# Altium PCB PCB1.PcbDoc (part 1 of 2)
Units mm, origin at the board's own origin, x right, y up, seen from the top; angles counter-clockwise.
Board outline 62 x 97.84 mm, 6 copper layers (Top Layer, +5V, Signal Layer 1, Signal Layer 2, +3.3V, Bottom Layer), stack 1.231 mm thick; 82 components, 61 nets, 315 pads, 76 vias.
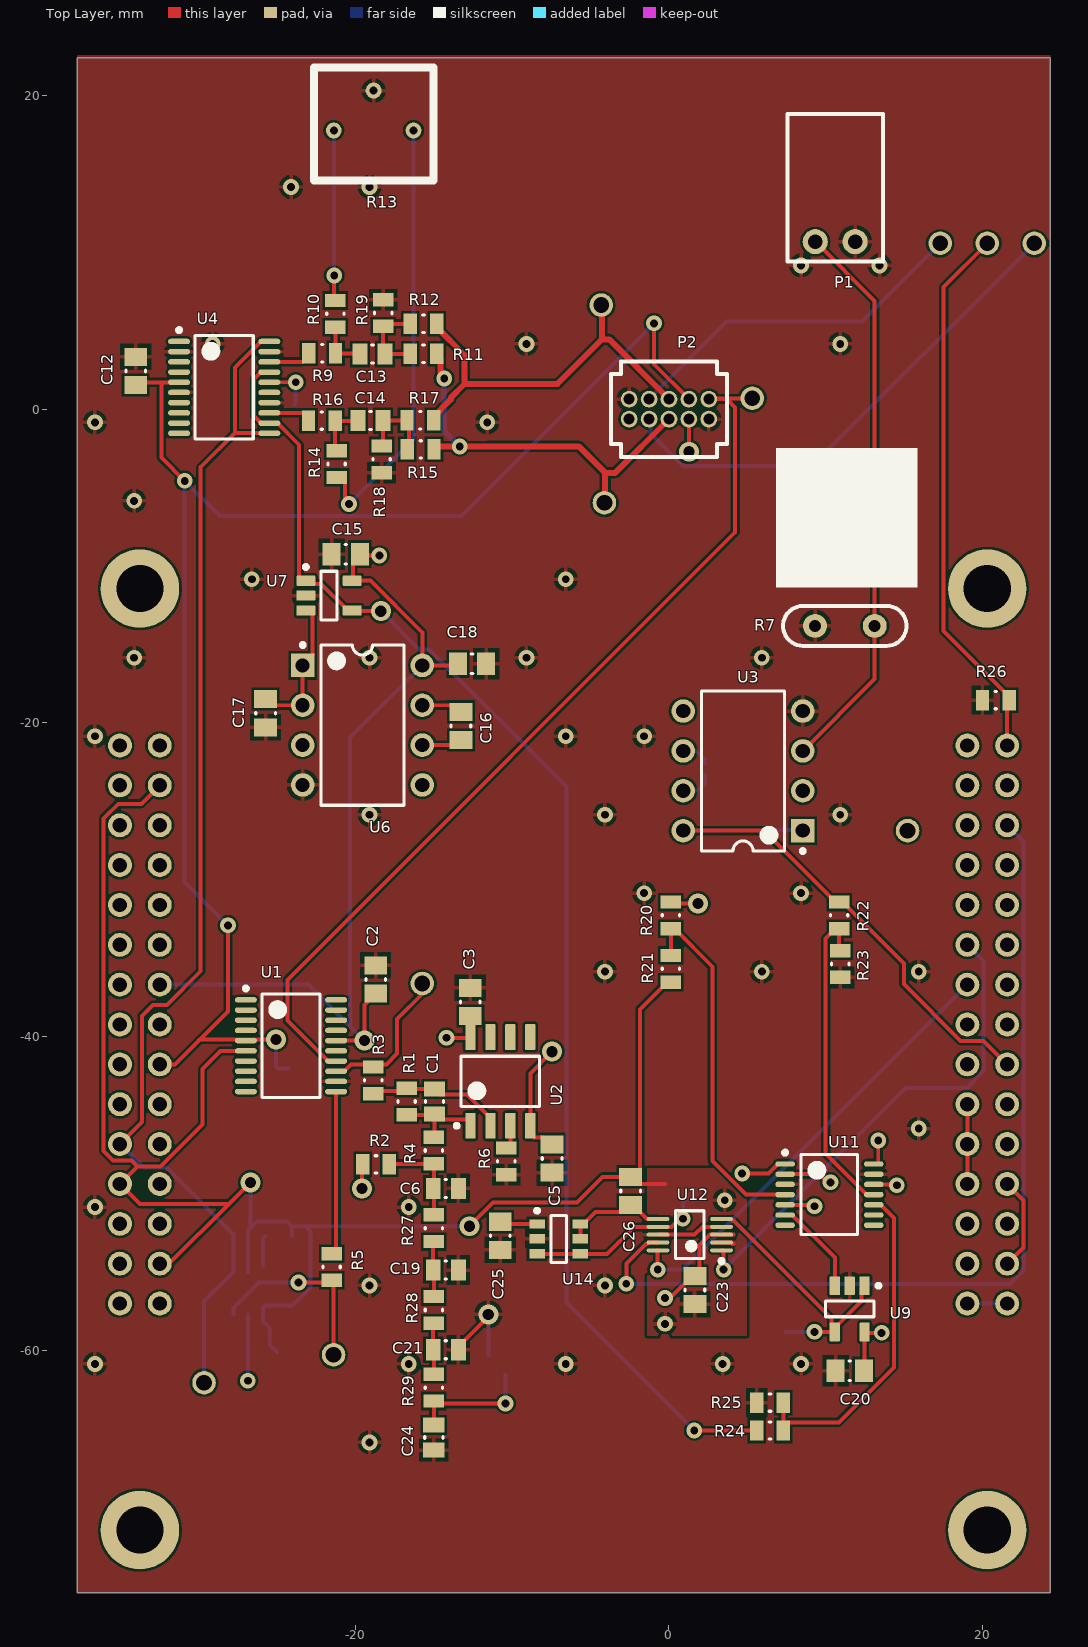
[diagram p0: Top Layer view]
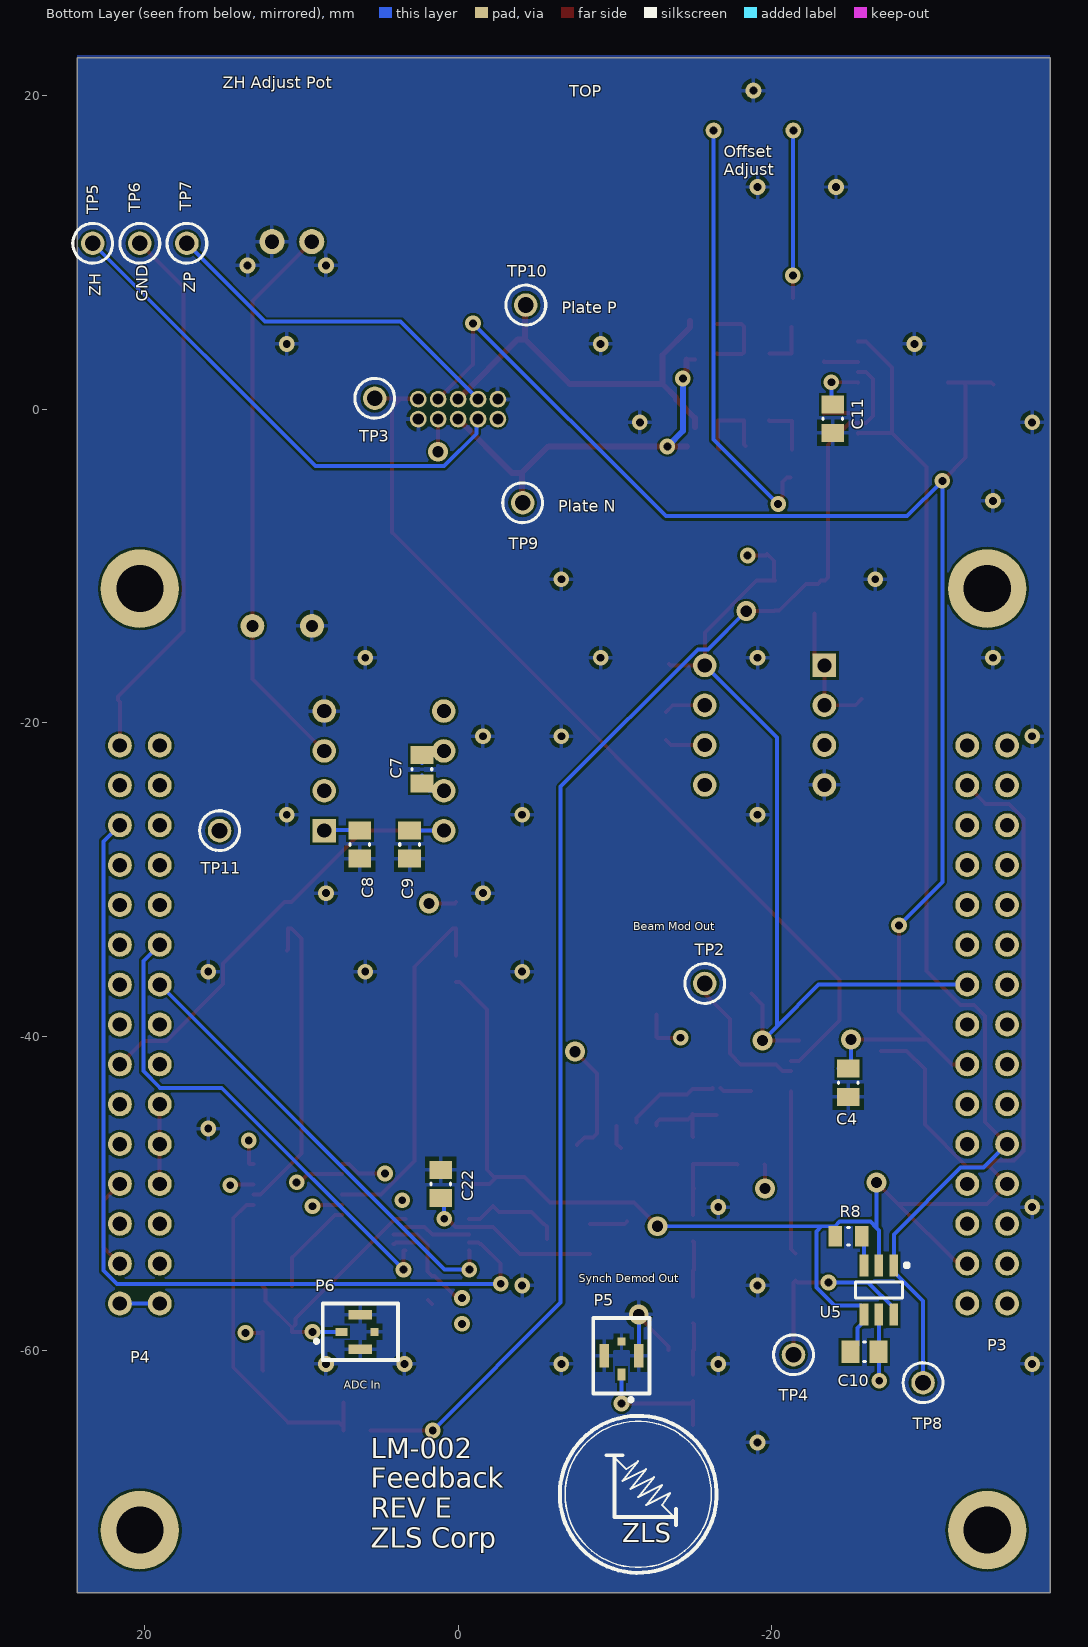
[diagram p1: Bottom Layer view, seen from below]
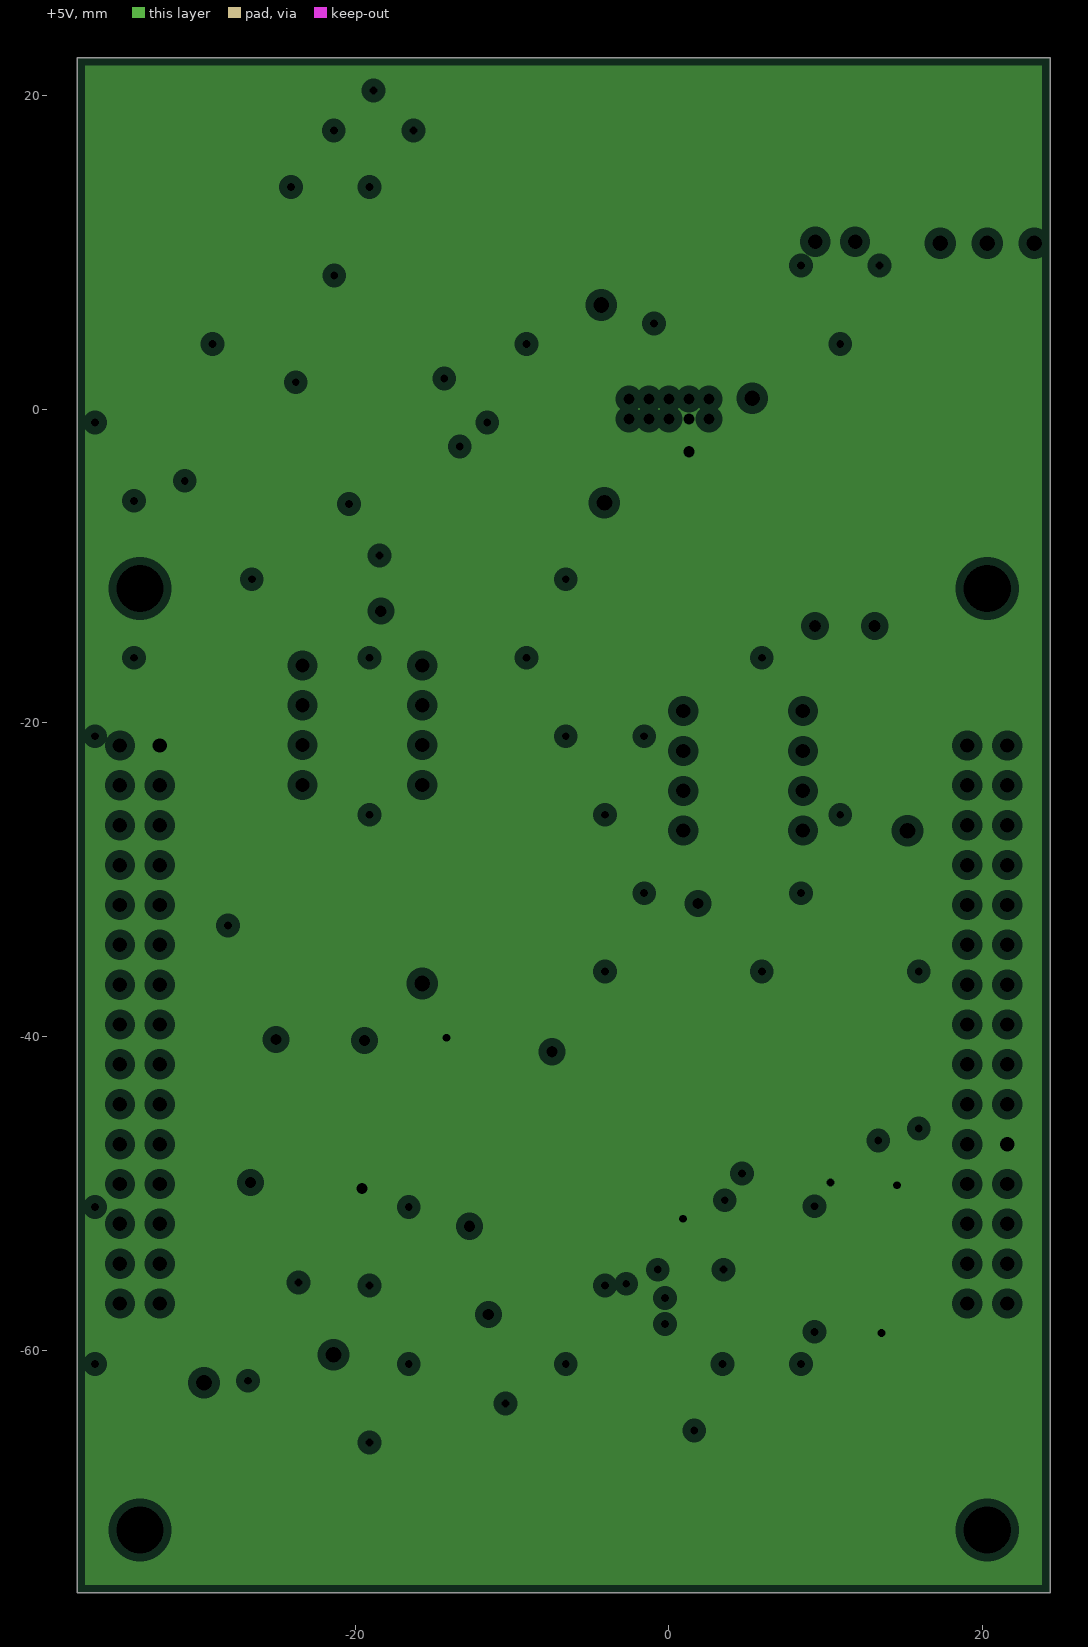
[diagram p2: +5V, clearances drawn from the general rule]
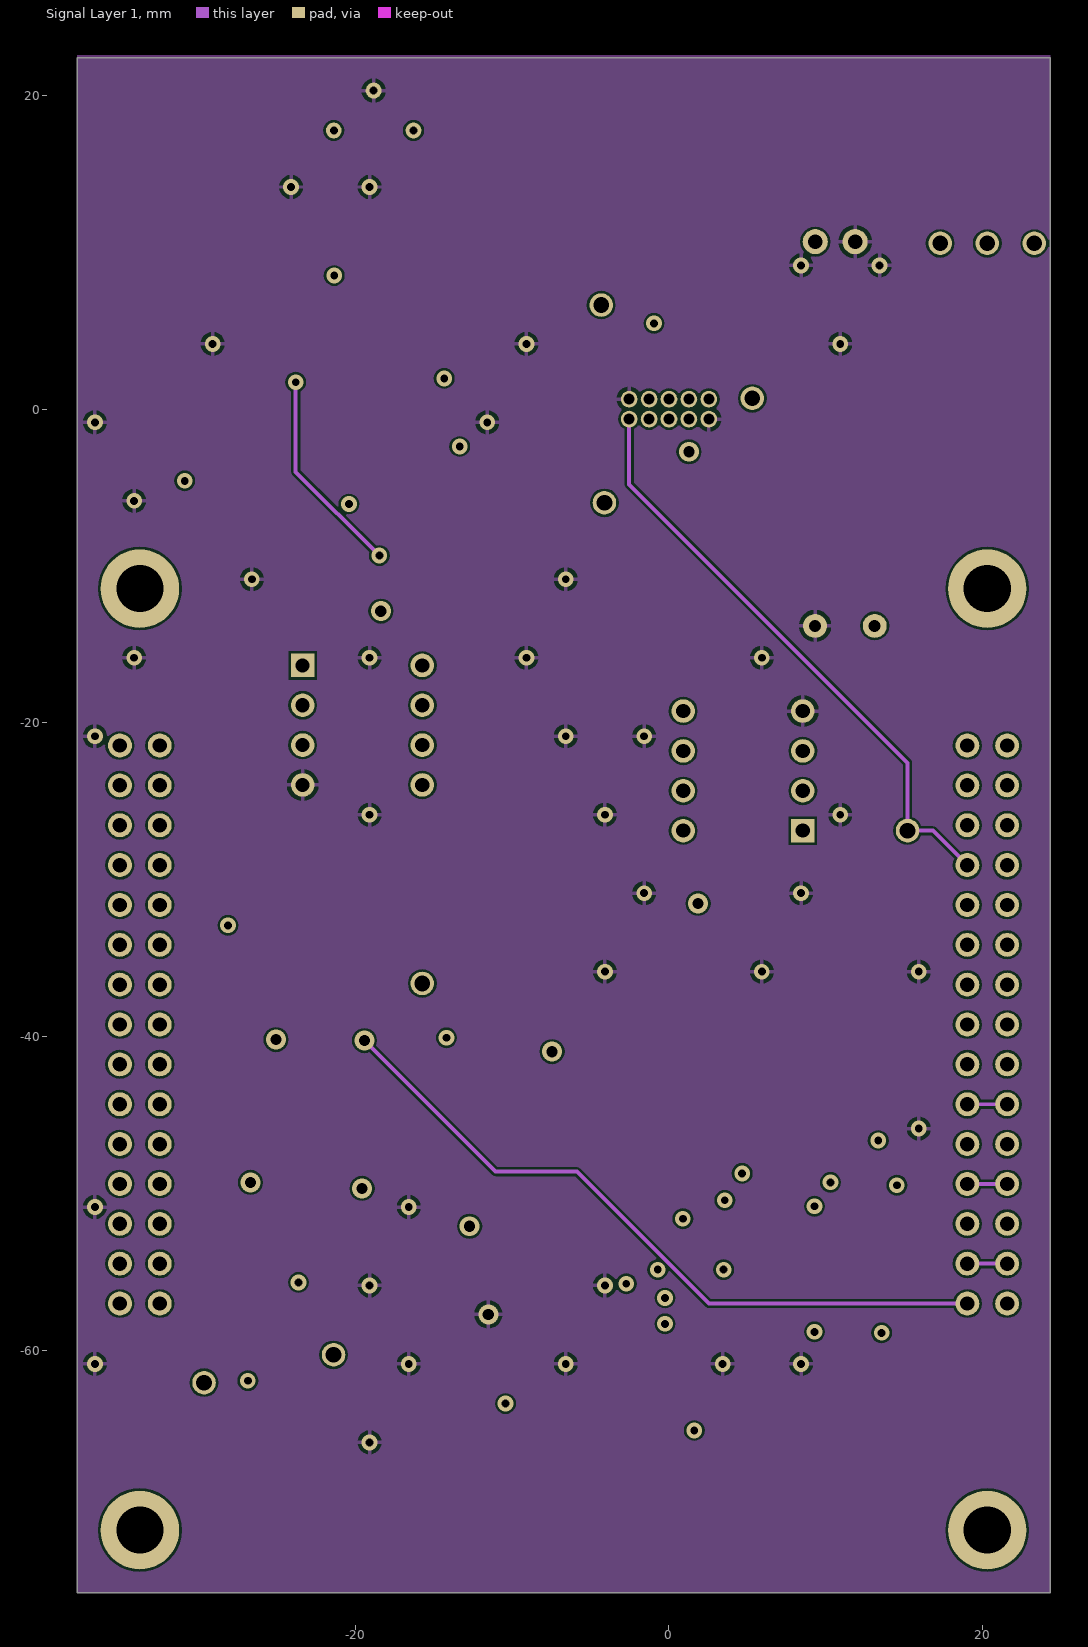
[diagram p3: Signal Layer 1]
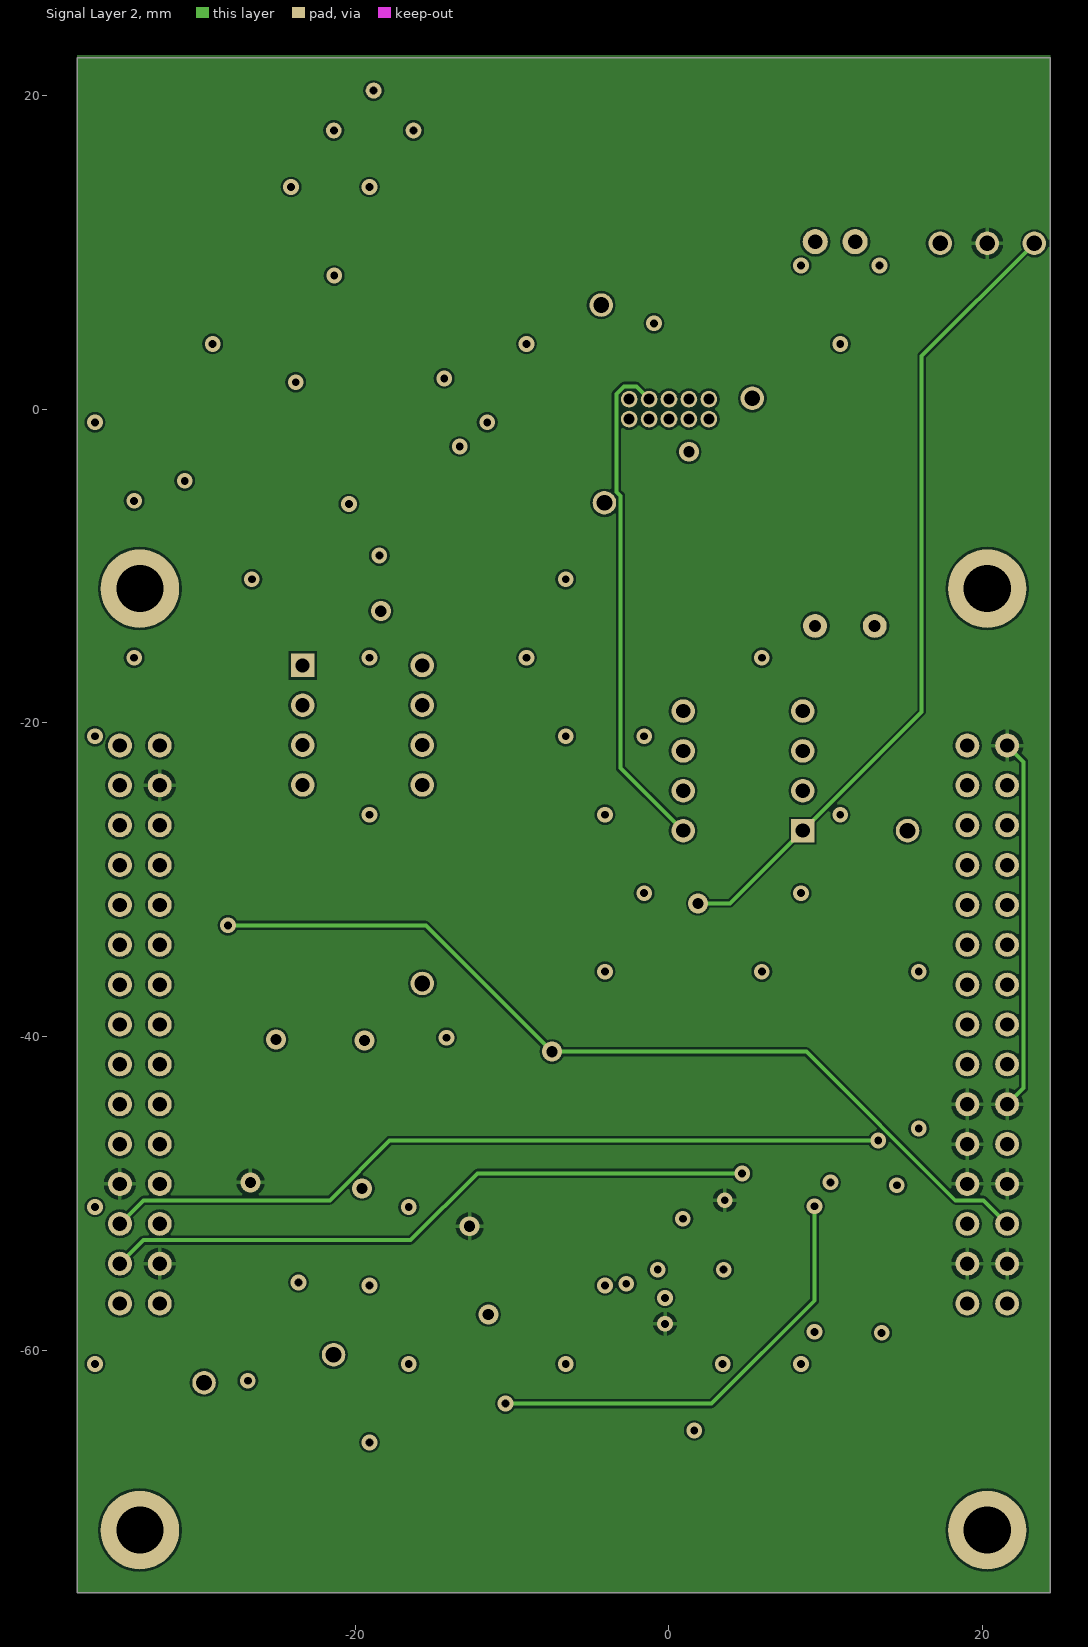
[diagram p4: Signal Layer 2]
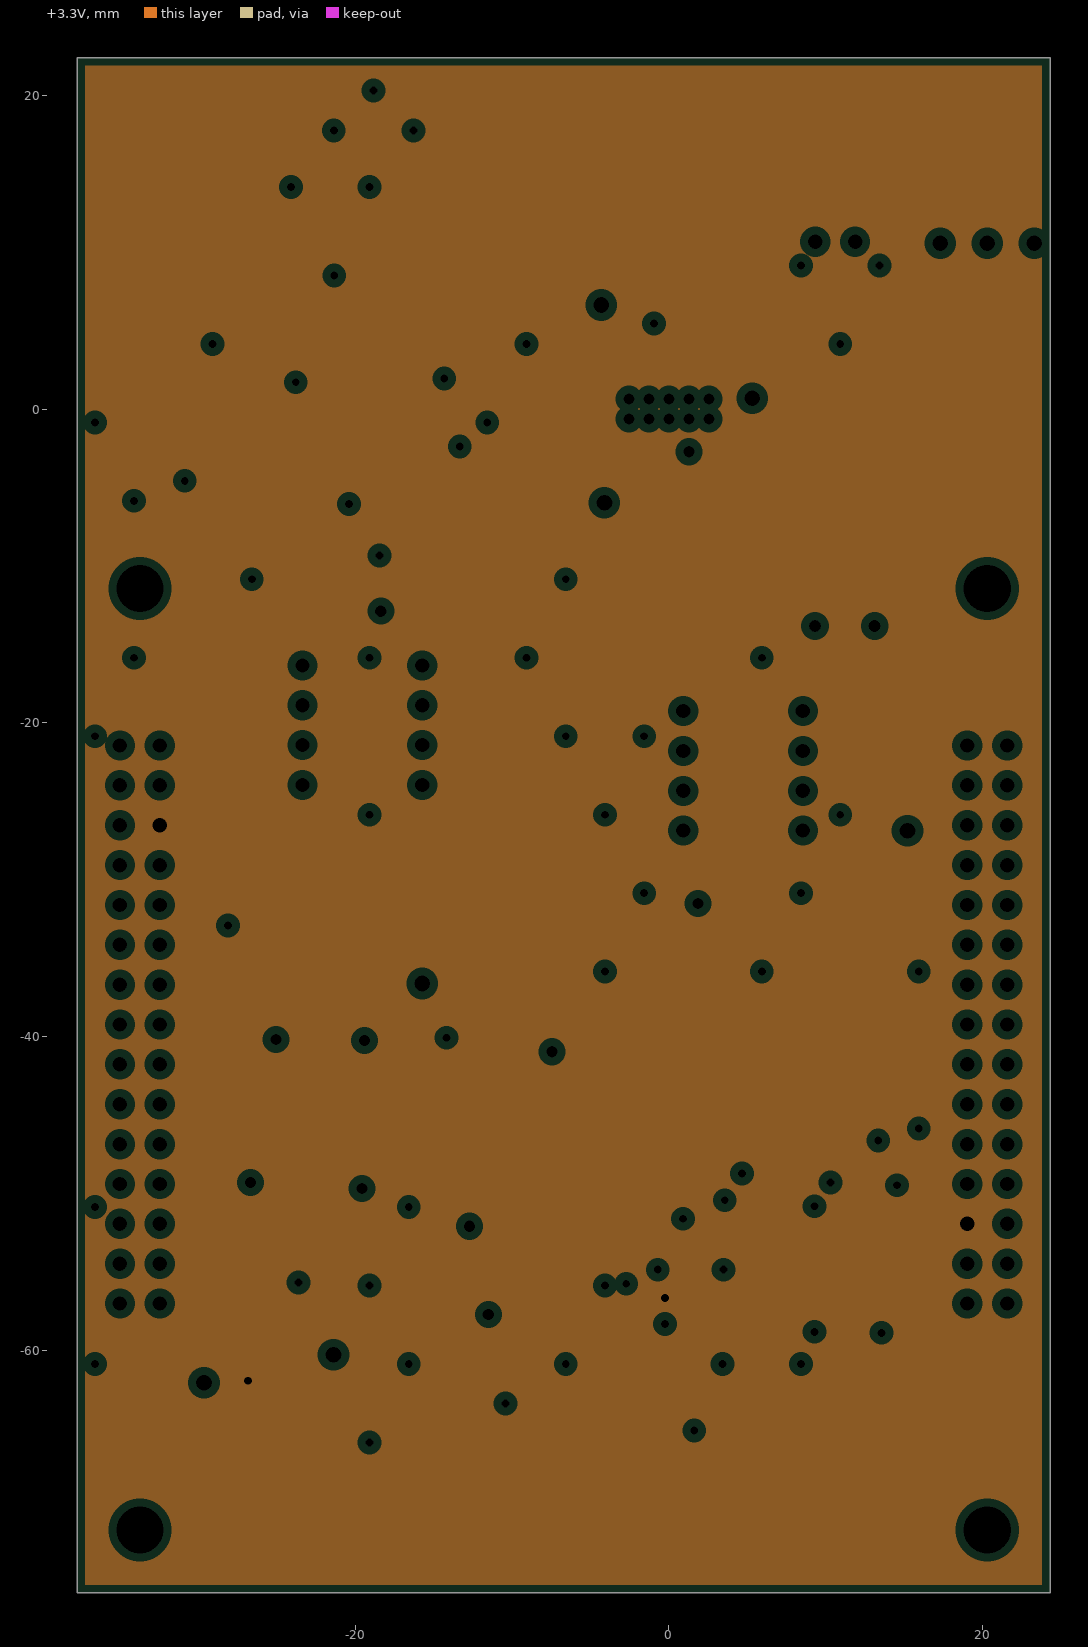
[diagram p5: +3.3V, clearances drawn from the general rule]

## Layer stack, top to bottom
Top Solder: solder mask 0.0102, Solder Resist, Dk 3.5
Top Layer: signal copper 0.0356
Dielectric 1: core 0.254, FR-4, Dk 4.2
+5V: plane copper 0.036, net +5
Dielectric 4: prepreg 0.127, Dk 4.2
Signal Layer 1: signal copper 0.036
Dielectric 5: core 0.254, Dk 4.2
Signal Layer 2: signal copper 0.036
Dielectric 6: prepreg 0.127, Dk 4.2
+3.3V: plane copper 0.036, net +3.3
Dielectric 3: core 0.254, Dk 4.2
Bottom Layer: signal copper 0.0356
Bottom Solder: solder mask 0.0102, Solder Resist, Dk 3.5

## Board outline
-37.722,-75.441 24.281,-75.441 24.281,22.403 -37.722,22.403

## Design rules (kind name [scope] priority, off if disabled: settings)
Clearance [All] p1: gap=0.15 ignorepadtopadclearanceinfootprint=TRUE except(0.04: SMDPad-SMDPad; 0.1: SMDPad-THPad)
DiffPairsRouting DiffPair_DiffPairsRouting [InDifferentialPair ('PLATE')] p1: maxlimit=0.254 minlimit=0.254 mostfreqgap=0.254 toplayer_minwidth=0.381 toplayer_maxwidth=0.381 toplayer_prefwidth=0.381 midlayer1_minwidth=0.381 midlayer1_maxwidth=0.381 midlayer1_prefwidth=0.381 midlayer2_minwidth=0.381 midlayer2_maxwidth=0.381 midlayer2_prefwidth=0.381 bottomlayer_minwidth=0.381 bottomlayer_maxwidth=0.381 bottomlayer_prefwidth=0.381 maxuncoupledlength=12.7
DiffPairsRouting [All] p2: maxlimit=0.254 minlimit=0.254 mostfreqgap=0.254 toplayer_minwidth=0.381 toplayer_maxwidth=0.381 toplayer_prefwidth=0.381 midlayer1_minwidth=0.381 midlayer1_maxwidth=0.381 midlayer1_prefwidth=0.381 midlayer2_minwidth=0.381 midlayer2_maxwidth=0.381 midlayer2_prefwidth=0.381 bottomlayer_minwidth=0.381 bottomlayer_maxwidth=0.381 bottomlayer_prefwidth=0.381 maxuncoupledlength=12.7
HoleSize [All] p1: absolutevalues=TRUE maxlimit=10 minlimit=0.076 maxpercent=80.000 minpercent=20.000
HoleToHoleClearance [All] p1: gap=0.12 allowstackedmicrovias=TRUE
MatchedLengths DiffPair_MatchedLengths [InDifferentialPair ('PLATE')] p1: tolerance=2.54 checknetsindiffpair=FALSE checkdiffpairvsdiffpair=TRUE checkxsignals=TRUE checkothers=TRUE
MinimumSolderMaskSliver [All] p1: minsoldermaskwidth=0.025
PlaneClearance [All] p1: clearance=0.508
PlaneConnect [All] p1: planeconnectstyle=Relief reliefexpansion=0.508 reliefentries=4 reliefconductorwidth=0.254 reliefairgap=0.254
PolygonConnect [All] p1: connectstyle=Relief reliefconductorwidth=0.254 reliefentries=4 polygonreliefangle="90 Angle" airgapwidth=0.254
RoutingVias [All] p1: holewidth=0.711 width=1.27 viastyle="Through Hole" minholewidth=0.127 minwidth=0.9 maxholewidth=1.4 maxwidth=2.54
SilkToSilkClearance [All] p1: silktosilkclearance=0.12
SilkToSolderMaskClearance [IsPad] p1: minsilkscreentomaskgap=0.12 clearancetoexposedcopper=TRUE
SolderMaskExpansion [All] p1: expansion=0.102
Width [All] p1: maxlimit=0.254 minlimit=0.1 preferedwidth=0.254
22 further rules are at their usual default settings.

## Classes and differential pairs
component class Sheet2: C20 C22 C23 C25 C26 P6 R20 R21 R22 R23 R24 R25 U9 U11 U12 U14
component class Sheet1: 19.685mil C1 C2 C3 C4 C5 C6 C7 C8 C9 C10 C11 C12 C13 C14 C15 C16 C17 C18 C19 C21 C24 P1 P2 P3 P4 P5 R1 R2 R3 R4 R5 R6 R7 R8 R9 R10 R11 R12 R13 R14 R15 R16 R17 R18 R19 R26 R27 R28 R29 TP2 TP3 TP4 TP5 TP6 TP7 TP8 TP9 TP10 TP11 U1 U2 U3 U4 U5 U6 U7
differential pair PLATE: +PLATE_P -PLATE_N

## Components (designator, comment, footprint, x,y, rotation, side; value= is the part's Value field where it differs from the comment)
C1 "470nF" CAPC0805(2012)75_L -14.946,-44.128 r270 top
C2 "CAP CER 0.1UF 25V X7R 0805" CAPC0805(2012)145_N -18.694,-36.347 r90 top
C3 "CAP CER 0.1UF 25V X7R 0805" CAPC0805(2012)145_N -12.66,-37.778 r90 top
C4 "CAP CER 0.1UF 25V X7R 0805" CAPC0805(2012)145_N -24.867,-42.926 r270 bottom
C5 "CAP CER 0.1UF 25V X7R 0805" CAPC0805(2012)145_N -7.453,-47.755 r270 top
C6 ".1u" CAPC0805(2012)75_L -14.224,-49.657 r180 top
C7 "CAP CER 0.1UF 25V X7R 0805" CAPC0805(2012)145_N 2.304,-22.951 r90 bottom
C8 "CAP CER 0.1UF 25V X7R 0805" CAPC0805(2012)145_N 6.263,-27.741 r270 bottom
C9 "Multilayer Ceramic Capacitors MLCC - SMD/SMT 0.01uF 50volts 10% X7R" CAPC0805(2012)145_N 3.088,-27.741 r270 bottom
C10 "CAP CER 0.1UF 25V X7R 0805" CAPC0805(2012)145_N -25.894,-60.075 r0 bottom
C11 "CAP CER 0.1UF 25V X7R 0805" CAPC0805(2012)145_N -23.876,-0.61 r270 bottom
C12 "CAP CER 0.1UF 25V X7R 0805" CAPC0805(2012)145_N -33.985,2.433 r90 top
C13 "CAP CER 1UF 25V X7R 0805" CAPC0805(2012)155_L -18.898,3.505 r180 top
C14 "CAP CER 1UF 25V X7R 0805" CAPC0805(2012)155_L -19.025,-0.737 r180 top
C15 "CAP CER 0.1UF 25V X7R 0805" CAPC0805(2012)145_N -20.599,-9.246 r0 top
C16 "CAP CER 0.1UF 25V X7R 0805" CAPC0805(2012)145_N -13.259,-20.193 r270 top
C17 "CAP CER 0.1UF 25V X7R 0805" CAPC0805(2012)145_N -25.705,-19.38 r270 top
C18 "Multilayer Ceramic Capacitors MLCC - SMD/SMT 0.01uF 50volts 10% X7R" CAPC0805(2012)145_N -12.548,-16.231 r0 top
C19 "1u" CAPC0805(2012)75_L -14.224,-54.864 r180 top
C20 "CAP CER 0.1UF 25V X7R 0805" CAPC0805(2012)145_N 11.518,-61.278 r0 top
C21 "1u" CAPC0805(2012)75_L -14.224,-59.944 r180 top
C22 "CAP CER 0.1UF 25V X7R 0805" CAPC0805(2012)145_N 1.11,-49.383 r90 bottom
C23 "CAP CER 0.1UF 25V X7R 0805" CAPC0805(2012)145_N 1.651,-56.134 r270 top
C24 "1u" CAPC0805(2012)75_L -14.986,-65.532 r90 top
C25 "CAP CER 0.1UF 25V X7R 0805" CAPC0805(2012)145_N -10.752,-52.685 r90 top
C26 "CAP CER 0.1UF 25V X7R 0805" CAPC0805(2012)145_N -2.446,-49.82 r90 top
P1 "SSW-102-02-G-S-RA" SSW-102-02-G-S-RA 11.862,10.668 r180 top
P2 "FTSH-105-01-L-D-K" FTSH-105-01-XXX-D-K 0,0 r180 top
P3 "TSW-115-14-G-D" TSW-115-14-G-D -32.449,-56.998 r270 bottom locked
P4 "TSW-115-14-G-D" TSW-115-14-G-D 21.551,-56.998 r270 bottom locked
P5 "SMB" RSP-122811-02 -10.414,-60.325 r180 bottom
P6 "SMB" RSP-122811-02 6.223,-58.801 r270 bottom
R1 "300k" RESC0805(2012)_L -16.724,-44.128 r90 top
R2 "100k" RESC0805(2012)_L -18.669,-48.133 r180 top
R3 "18.2k" RESC0805(2012)_L -18.847,-42.774 r90 top
R4 "511k" RESC0805(2012)_L -14.986,-47.244 r90 top
R5 "0" RESC0805(2012)_L -21.502,-54.674 r90 top
R6 "33k" RESC0805(2012)_L -10.374,-47.938 r90 top
R7 "TBD" VH102K 13.11,-13.815 r180 top
R8 "43.2K" RESC0805(2012)_L -24.878,-52.709 r0 bottom
R9 "4.02K" RESC0805(2012)_L -22.098,3.556 r180 top
R10 "7.5k" RESC0805(2012)_L -21.26,6.071 r270 top
R11 "0" RESC0805(2012)_L -15.646,3.531 r180 top
R12 "DNP" RESC0805(2012)_L -15.646,5.436 r180 top
R13 "TRIMMER 5K OHM 0.25W PC PIN" "TRIMMER 2.54" -21.361,17.755 r0 top
R14 "7.5k" RESC0805(2012)_L -21.184,-3.505 r270 top
R15 "DNP" RESC0805(2012)_L -15.824,-2.565 r180 top
R16 "4.02K" RESC0805(2012)_L -22.123,-0.737 r0 top
R17 "0" RESC0805(2012)_L -15.85,-0.711 r180 top
R18 "1M" RESC0805(2012)_L -18.313,-3.2 r90 top
R19 "1M" RESC0805(2012)_L -18.212,6.121 r270 top
R20 "100k" RESC0805(2012)_L 0.119,-32.263 r90 top
R21 "10k" RESC0805(2012)_L 0.119,-35.667 r90 top
R22 "100k" RESC0805(2012)_L 10.838,-32.263 r90 top
R23 "10k" RESC0805(2012)_L 10.914,-35.362 r90 top
R24 "10K" RESC0805(2012)_L 6.438,-65.088 r180 top
R25 "10K" RESC0805(2012)_L 6.438,-63.31 r0 top
R26 "0" RESC0805(2012)_L 20.828,-18.542 r180 top
R27 "20k" RESC0805(2012)_L -14.986,-52.197 r90 top
R28 "20k" RESC0805(2012)_L -14.986,-57.404 r90 top
R29 "20k" RESC0805(2012)_L -14.986,-62.357 r90 top
TP2 "5003" KSTN-5003 -15.723,-36.601 r90 bottom
TP3 "5003" KSTN-5003 5.309,0.686 r90 bottom
TP4 "5003" KSTN-5003 -21.375,-60.262 r270 bottom
TP5 "5003" KSTN-5003 23.281,10.562 r90 bottom
TP6 "5003" KSTN-5003 20.281,10.562 r90 bottom
TP7 "5003" KSTN-5003 17.281,10.562 r90 bottom
TP8 "5003" KSTN-5003 -29.63,-62.04 r270 bottom
TP9 "5003" KSTN-5003 -4.115,-5.969 r270 bottom
TP10 "5003" KSTN-5003 -4.318,6.629 r90 bottom
TP11 "5003" KSTN-5003 15.201,-26.861 r90 bottom
U1 "MAX333AEUP+" TSOP65P640X90-20N -24.087,-40.569 r0 top
U2 "LPC662AIM" D0008A_M -10.745,-42.843 r90 top
U3 "AD584KNZ" ADI-N-8 4.717,-23.053 r180 top
U4 "MAX333AEUP+" TSOP65P640X90-20N -28.346,1.383 r0 top
U5 "LTC6994MPS6-2#TRMPBF" LTC6994MPS6-2#TRMPBF -26.816,-56.135 r270 bottom
U6 "AD584KNZ" ADI-N-8 -19.533,-20.142 r0 top
U7 "OPA188AIDBVR" DBV0005A_M -21.666,-11.887 r0 top
U9 "OPA188AIDBVR" DBV0005A_M 11.518,-57.341 r270 top
U11 "ADG1204YRUZ-REEL7" ADI-RU-14_L 10.222,-50.056 r0 top
U12 "MAX11100EUB+T" U10+2_L 1.325,-52.608 r180 top
U14 "MAX6070AAUT41+T" SOT95P280X445-6N -7.028,-52.881 r0 top

## Footprints (in the part's own frame and the unit in brackets; to place one, negate y for a bottom-side part, rotate by r counter-clockwise, add the part's x,y. Pads: shape width x height; smd on the part's side, far side on the other; paste and mask are expansions set on the pad)
ADI-N-8 [mm] "DIP, 8-Leads, Body 9.59x6.6mm, Pitch 2.54mm"
  rect 1.5x1.5 hole 0.9: 1(-3.81,3.81)
  round 1.5 hole 0.9: 2(-3.81,1.27) 3(-3.81,-1.27) 4(-3.81,-3.81) 5(3.81,-3.81) 6(3.81,-1.27) 7(3.81,1.27) 8(3.81,3.81)
  silkscreen extent -3.94,-5.1 2.65,5.23, body extent -3.95,-5.07 3.95,5.07, height 5.33
ADI-RU-14_L [mm] "SOP, 14-Leads, Body 5x4.4mm, Pitch 0.65mm, IPC High Density"
  oval 1.25x0.35 smd: 1(-2.825,1.95) 2(-2.825,1.3) 3(-2.825,0.65) 4(-2.825,0) 5(-2.825,-0.65) 6(-2.825,-1.3) 7(-2.825,-1.95) 8(2.825,-1.95) 9(2.825,-1.3) 10(2.825,-0.65) 11(2.825,0) 12(2.825,0.65) 13(2.825,1.3) 14(2.825,1.95)
  silkscreen extent -2.95,-2.55 1.8,2.8, body extent -2.25,-2.55 2.25,2.55, height 1.2
CAPC0805(2012)75_L [mm] "Chip Capacitor, Body 2.0x1.2mm, Height 0.75mm, IPC High Density"
  rect 0.95x1.35 smd: 1(-0.8,0) 2(0.8,0)
  silkscreen extent -0.05,-0.57 0.05,0.58, body extent -1.1,-0.72 1.1,0.72, height 0.75
CAPC0805(2012)145_N [mm] "Chip Capacitor, Body 2.0x1.2mm, Height 1.45mm, IPC Medium Density"
  rect 1.15x1.45 smd: 1(-0.9,0) 2(0.9,0)
  silkscreen extent -0.05,-0.62 0.05,0.63, body extent -1.1,-0.72 1.1,0.73, height 1.45
CAPC0805(2012)155_L [mm] "Chip Capacitor, Body 2.0x1.2mm, Height 1.55mm, IPC High Density"
  rect 0.95x1.35 smd: 1(-0.8,0) 2(0.8,0)
  silkscreen extent -0.05,-0.58 0.05,0.57, body extent -1.1,-0.72 1.1,0.72, height 1.55
D0008A_M [mm] "SOIC, 8-Leads, Body 5x4mm, Pitch 1.27mm, IPC Low Density"
  rrect15% 1.65x0.65 smd: 1(-2.825,1.905) 2(-2.825,0.635) 3(-2.825,-0.635) 4(-2.825,-1.905) 5(2.825,-1.905) 6(2.825,-0.635) 7(2.825,0.635) 8(2.825,1.905)
  silkscreen extent -2.95,-2.5 1.6,2.9, body extent -3,-2.45 3,2.45, height 1.63
DBV0005A_M [mm] "SOT23, 5-Leads, Body 3.05x1.75mm, Pitch 0.95mm, IPC Low Density"
  rrect15% 1.2x0.65 smd: 1(-1.475,0.95) 2(-1.475,0) 3(-1.475,-0.95) 4(1.475,-0.95) 5(1.475,0.95)
  silkscreen extent -1.6,-1.55 0.5,1.95, body extent -1.42,-1.46 1.42,1.46, height 1.08
FTSH-105-01-XXX-D-K [mil]
  round 42 hole 28 mask+3: 1(-100,-25) 2(-100,25) 3(-50,-25) 4(-50,25) 5(0,-25) 6(0,25) 7(50,-25) 8(50,25) 9(100,-25) 10(100,25)
  silkscreen extent -145,-120 145,120
KSTN-5003 [mm] "Test Point, Through Hole, Dia 2.54mm"
  round 1.5 hole 1: 1(0,0)
  silkscreen extent -1.27,-1.27 1.27,1.27, body extent -1.27,-1.27 1.27,1.27, height 4.57
LTC6994MPS6-2#TRMPBF [mm] "SOT23, 6-Leads, Body 2.90x3.23mm, Pitch 0.95mm, IPC Medium Density"
  rect 1.4x0.55 smd: 1(-1.575,0.95) 2(-1.575,0) 3(-1.575,-0.95) 4(1.575,-0.95) 5(1.575,0) 6(1.575,0.95)
  silkscreen extent -1.7,-1.5 0.5,1.9, body extent -1.92,-1.5 1.92,1.5, height 1
RESC0805(2012)_L [mm] "Chip Resistor, Body 2.0x1.3mm, IPC High Density"
  rect 0.85x1.3 smd: 1(-0.85,0) 2(0.85,0)
  silkscreen extent -0.05,-0.55 0.05,0.55, body extent -1.1,-0.67 1.1,0.68, height 0.7
RSP-122811-02 [mm]
  rect 0.5x0.75 smd: 1(0,-1.2)
  rect 0.6x1.5 smd: 2(-1.1,0) 2(1.1,0)
  rect 0.5x0.5 smd: 2(0,0.9)
  silkscreen extent -1.8,-2.9 1.8,2.4
SOT95P280X445-6N [mm] "SOT23, 6-Leads, Body 2.90x2.80mm, Pitch 0.95mm, IPC Medium Density"
  rect 1x0.6 smd: 1(-1.375,0.95) 2(-1.375,0) 3(-1.375,-0.95) 4(1.375,-0.95) 5(1.375,0) 6(1.375,0.95)
  silkscreen extent -1.5,-1.5 0.5,1.92, body extent -2.11,-1.78 2.11,1.73, height 1.08
SSW-102-02-G-S-RA [mm]
  round 1.6 hole 0.91: 1(0,0) 2(2.54,0)
  silkscreen extent -1.78,-8.13 4.32,1.27, body extent -1.52,-8.06 4.06,0.44, height 3.21
"TRIMMER 2.54" [mil]
  round 40 hole 20: 1(0,0) 2(100,100) 3(200,0)
  silkscreen extent -50,-125 250,158, body extent -60,-126 260,200, height 175
TSOP65P640X90-20N [mm] "TSOP, 20-Leads, Body 6.50x4.40mm, Pitch 0.65mm, IPC Medium Density"
  oval 1.4x0.35 smd: 1(-2.875,2.925) 2(-2.875,2.275) 3(-2.875,1.625) 4(-2.875,0.975) 5(-2.875,0.325) 6(-2.875,-0.325) 7(-2.875,-0.975) 8(-2.875,-1.625) 9(-2.875,-2.275) 10(-2.875,-2.925) 11(2.875,-2.925) 12(2.875,-2.275) 13(2.875,-1.625) 14(2.875,-0.975) 15(2.875,-0.325) 16(2.875,0.325) 17(2.875,0.975) 18(2.875,1.625) 19(2.875,2.275) 20(2.875,2.925)
  silkscreen extent -3,-3.3 1.85,3.77, body extent -2.25,-3.3 2.25,3.3, height 0.9
TSW-115-14-G-D [mil]
  round 60 hole 36.02: 1(-1400,100) 2(-1400,0) 3(-1300,100) 4(-1300,0) 5(-1200,100) 6(-1200,0) 7(-1100,100) 8(-1100,0) 9(-1000,100) 10(-1000,0) 11(-900,100) 12(-900,0) 13(-800,100) 14(-800,0) 15(-700,100) 16(-700,0) 17(-600,100) 18(-600,0) 19(-500,100) 20(-500,0) 21(-400,100) 22(-400,0) 23(-300,100) 24(-300,0) 25(-200,100) 26(-200,0) 27(-100,100) 28(-100,0) 29(0,100) 30(0,0)
  body extent -1450,-50 50,150, height 118
U10+2_L [mm] "TSSOP, 10-Leads, Body 3x3mm, Pitch 0.5mm, IPC High Density"
  oval 1.45x0.25 smd: 1(-2.025,1) 2(-2.025,0.5) 3(-2.025,0) 4(-2.025,-0.5) 5(-2.025,-1) 6(2.025,-1) 7(2.025,-0.5) 8(2.025,0) 9(2.025,0.5) 10(2.025,1)
  silkscreen extent -2.15,-1.53 0.9,1.8, body extent -1.55,-1.55 1.55,1.55, height 1.1
VH102K [mil] "Hermetically Sealed High Precision Resistor"
  round 60 hole 30: 1(0,0) 2(149.61,0)
  silkscreen extent -80,-50 230,50

## Part data
C1: library part CMP-1036-02117-1, "CAP CER 0.47UF 25V X7R 0805", Manufacturer="Murata Electronics North America", Manufacturer Part Number=GRM219R71E474KA88D, Operating Temperature="-55°C ~ 125°C", Package / Case="0805 (2012 Metric)", Ratings=-, Supplier Part Number 1=490-11584-1-ND, Temperature Coefficient=X7R, Tolerance=±10%, Voltage - Rated=25V, Applications="General Purpose", Category=Capacitors, ComponentLink1Description=https://www.murata.com/~/media/webrenewal/support/library/catalog/products/capacitor/mlcc/c02e.ashx?la=en-us, ComponentLink1URL=https://www.murata.com/~/media/webrenewal/support/library/catalog/products/capacitor/mlcc/c02e.ashx?la=en-us, Features=-, Height - Seated (Max)=-, Lead Spacing=-, Lead Style=-, Mounting Type="Surface Mount, MLCC", Packaging="Cut Tape (CT)", Part Status=Active, Pricing 1="1=0.38, 10=0.262, 100=0.1573, 500=0.118, 1000=0.09964 (USD)", RoHS="RoHS Compliant", Size / Dimension="0.079\" L x 0.049\" W (2.00mm x 1.25mm)", Stock 1=410, Supplier 1=Digi-Key, Thickness (Max)="0.037\" (0.95mm)"
C2 C3 C4 C5 C7 C8 C10 C11 C12 C15 C16 C17 C20 C22 C23 C25 C26: library part CMP-1036-04795-1, Capacitance=0.1µF, Manufacturer="Murata Electronics North America", Manufacturer Part Number=GRM21BR71E104KA01L, Operating Temperature="-55°C ~ 125°C", Package / Case="0805 (2012 Metric)", Ratings=-, Supplier Part Number 1=490-1673-6-ND, Temperature Coefficient=X7R, Tolerance=±10%, Voltage - Rated=25V, Applications="General Purpose", Category=Capacitors, ComponentLink1Description=http://www.murata.com/~/media/webrenewal/support/library/catalog/products/capacitor/mlcc/c02e.ashx, ComponentLink1URL=http://www.murata.com/~/media/webrenewal/support/library/catalog/products/capacitor/mlcc/c02e.ashx, Features=-, Height - Seated (Max)=-, Lead Spacing=-, Lead Style=-, Mounting Type="Surface Mount, MLCC", Packaging=Digi-Reel®, Part Status=Active, Pricing 1="1=0.2, 10=0.145, 100=0.0683, 500=0.04788, 1000=0.03964 (USD)", RoHS="RoHS Compliant", Size / Dimension="0.079\" L x 0.049\" W (2.00mm x 1.25mm)", Stock 1=891652, Supplier 1=Digi-Key, Thickness (Max)="0.053\" (1.35mm)"
C6 C19 C21 C24: library part CMP-1036-02117-1, "CAP CER 22UF 25V X5R 0805"
C9 C18: library part CMP-1036-04795-1, Capacitance=10nF, Case/Package=0805, Case Code (Metric)=2012, Dielectric=X7R, Dielectric Material=Ceramic, Manufacturer=Kemet, Manufacturer Part Number=C0805C103K5RACAUTO, Max Operating Temperature=125°C, Min Operating Temperature=-55°C, Package Quantity=1, Supplier Part Number 1=399-6924-1-ND, Tolerance=10%, Voltage Rating=50V, Case Code (Imperial)=0805, ComponentLink1Description=https://datasheet.ciiva.com/22700/1693454-22700519.pdf, ComponentLink1URL=https://datasheet.ciiva.com/22700/1693454-22700519.pdf, ComponentLink2Description=https://datasheet.ciiva.com/7842/1693454-7842175.pdf, ComponentLink2URL=https://datasheet.ciiva.com/7842/1693454-7842175.pdf, Contact Plating=Tin, Depth=1.25mm, Height=0.78mm, Length=2mm, Mount="Surface Mount", Packaging="Tape and Reel", Pricing 1="1=0.12, 10=0.087, 100=0.041, 500=0.0287, 1000=0.0238 (USD)", Radiation Hardening=No, REACH SVHC="No SVHC", Stock 1=63236, Supplier 1=Digi-Key, Termination=SMD/SMT, Thickness=0.035inch, Voltage Rating (DC)=50V, Width=0.049inch
C13 C14: library part CMP-1036-04882-1, Capacitance=220pF, Manufacturer="Murata Electronics North America", Manufacturer Part Number=GRM21BR71E105KA99L, Operating Temperature="-55°C ~ 125°C", Package / Case="0805 (2012 Metric)", Ratings=-, Supplier Part Number 1=490-6484-6-ND, Temperature Coefficient=X7R, Tolerance=±10%, Voltage - Rated=25V, Applications="General Purpose", Category=Capacitors, ComponentLink1Description=http://www.murata.com/~/media/webrenewal/support/library/catalog/products/capacitor/mlcc/c02e.ashx, ComponentLink1URL=http://www.murata.com/~/media/webrenewal/support/library/catalog/products/capacitor/mlcc/c02e.ashx, Features=-, Height - Seated (Max)=-, Lead Spacing=-, Lead Style=-, Mounting Type="Surface Mount, MLCC", Packaging=Digi-Reel®, Part Status=Active, Pricing 1="1=0.14, 10=0.099, 100=0.0468, 500=0.0328, 1000=0.02715 (USD)", RoHS="RoHS Compliant", Size / Dimension="0.079\" L x 0.049\" W (2.00mm x 1.25mm)", Stock 1=295074, Supplier 1=Digi-Key, Thickness (Max)="0.053\" (1.35mm)"
P1: "CONN RCPT .100\" 2POS R/A SGL AU", Current Rating="5.7A per Contact", Insulation Color=Black, Manufacturer="Samtec Inc.", Material Flammability Rating="UL94 V-0", Operating Temperature="-55°C ~ 125°C", Supplier Part Number 1=SAM1225-02-ND, Voltage Rating=-, Applications=-, Category="Connectors, Interconnects", ComponentLink1Description=http://suddendocs.samtec.com/prints/ssw-1xx-xx-xxx-x-xx-xxx-xx-mkt.pdf, ComponentLink1URL=http://suddendocs.samtec.com/prints/ssw-1xx-xx-xxx-x-xx-xxx-xx-mkt.pdf, Connector Type=Receptacle, Contact Finish - Mating=Gold, Contact Finish - Post=Gold, Contact Finish Thickness - Mating="20.0µin (0.51µm)", Contact Finish Thickness - Post="3.00µin (0.076µm)", Contact Length - Post="0.100\" (2.54mm)", Contact Material="Phosphor Bronze", Contact Shape=Square, Contact Type=Forked, Fastening Type=Push-Pull, Features=-, Ingress Protection=-, Insulation Height="0.095\" (2.41mm)", Insulation Material="Liquid Crystal Polymer (LCP)", Manufacturer Part Number=SSW-102-02-G-S-RA, Mated Stacking Heights=-, Mounting Type="Through Hole, Right Angle", Number of Positions=2, Number of Positions Loaded=All, Packaging=Bulk, Part Status=Active, Pitch - Mating="0.100\" (2.54mm)", Pricing 1="1=1.8, 10=1.607, 100=1.3234, 500=1.04614, 1000=0.89804, 5000=0.81926, 10000=0.78775 (USD)", RoHS="RoHS Compliant", Row Spacing - Mating=-, Stock 1=304, Style="Board to Board or Cable", Supplier 1=Digi-Key, Termination=Solder
P2: library part FTSH-105-01-XXX-D-K, "TERMINAL STRIP, .050\"(1.27mm) PITCH, 10 PINS, KEYING OPTION.", Current Rating="3.4A per Contact", Insulation Color=Black, Manufacturer="Samtec Inc.", Material Flammability Rating="UL94 V-0", Operating Temperature="-55°C ~ 125°C", Supplier Part Number 1=SAM8798-ND, Voltage Rating=-, Applications=-, Category="Connectors, Interconnects", ComponentLink1Description=http://suddendocs.samtec.com/prints/ftsh-1xx-xx-xx-d-xx-xx-mkt.pdf, ComponentLink1URL=http://suddendocs.samtec.com/prints/ftsh-1xx-xx-xx-d-xx-xx-mkt.pdf, Connector Type="Header, Cuttable", Contact Finish - Mating=Gold, Contact Finish - Post=Tin, Contact Finish Thickness - Mating="10.0µin (0.25µm)", Contact Finish Thickness - Post=-, Contact Length - Mating="0.120\" (3.05mm)", Contact Length - Post="0.090\" (2.29mm)", Contact Material="Phosphor Bronze", Contact Shape=Square, Contact Type="Male Pin", Fastening Type=Push-Pull, Features="Keying Shroud", Ingress Protection=-, Insulation Height="0.099\" (2.51mm)", Insulation Material="Liquid Crystal Polymer (LCP)", Manufacturer Part Number=FTSH-105-01-L-D-K, Mated Stacking Heights=-, Mounting Type="Through Hole", Number of Positions=10, Number of Positions Loaded=All, Number of Rows=2, Overall Contact Length="0.309\" (7.86mm)", Packaging=Tube, Part Status=Active, Pitch - Mating="0.050\" (1.27mm)", Pricing 1="1=2.98, 92=2.49902, 184=2.38, 552=2.02301, 1012=1.7255, 5060=1.547 (USD)", RoHS="RoHS Compliant", Row Spacing - Mating="0.050\" (1.27mm)", Shrouding=Unshrouded, Stock 1=8521, Style="Board to Board or Cable", Supplier 1=Digi-Key, Termination=Solder
P3 P4: library part "Header 15X2", "Header, 15-Pin, Dual row", Current Rating=-, Insulation Color=Black, Manufacturer="Samtec Inc.", Material Flammability Rating="UL94 V-0", Operating Temperature="-55°C ~ 125°C", Supplier Part Number 1=SAM1052-15-ND, Applications=-, Category="Connectors, Interconnects", ComponentLink1Description=http://suddendocs.samtec.com/prints/tsw-xxx-xx-xxx-x-xx-xxx-mkt.pdf, ComponentLink1URL=http://suddendocs.samtec.com/prints/tsw-xxx-xx-xxx-x-xx-xxx-mkt.pdf, Connector Type=Header, Contact Finish - Mating=Gold, Contact Finish - Post=Gold, Contact Finish Thickness - Mating="10.0µin (0.25µm)", Contact Finish Thickness - Post="3.00µin (0.076µm)", Contact Length - Mating="0.320\" (8.13mm)", Contact Length - Post="0.110\" (2.79mm)", Contact Material="Phosphor Bronze", Contact Shape=Square, Contact Type="Male Pin", Fastening Type=Push-Pull, Features=-, Ingress Protection=-, Insulation Height="0.100\" (2.54mm)", Insulation Material="Polybutylene Terephthalate (PBT)", Manufacturer Part Number=TSW-115-14-G-D, Mated Stacking Heights=-, Mounting Type="Through Hole", Number of Positions=30, Number of Positions Loaded=All, Number of Rows=2, Overall Contact Length="0.530\" (13.46mm)", Packaging=Bulk, Part Status=Active, Pitch - Mating="0.100\" (2.54mm)", Pricing 1="1=3.69, 10=3.3, 100=2.7176, 500=2.1482, 1000=1.84409, 5000=1.68233, 10000=1.61763 (USD)", RoHS="RoHS Compliant", Row Spacing - Mating="0.100\" (2.54mm)", Shrouding=Unshrouded, Stock 1=0, Style="Board to Board or Cable", Supplier 1=Digi-Key, Termination=Solder, Voltage Rating=-
P5 P6: "SMB Straight Connector", LatestRevisionDate=17-Jul-2002, LatestRevisionNote="Re-released for DXP Platform.", Publisher="Altium Limited"
R1 R27 R28 R29: library part CMP-1013-00215-1, "RES SMD 300K OHM 1% 1/8W 0805", Manufacturer="Vishay Dale", Manufacturer Part Number=CRCW0805300KFKEAHP, Operating Temperature="-55°C ~ 155°C", Package / Case="0805 (2012 Metric)", Power (Watts)="0.5W, 1/2W", Supplier Device Package=0805, Supplier Part Number 1=541-300KTCT-ND, Temperature Coefficient=±100ppm/°C, Tolerance=±1%, Category=Resistors, ComponentLink1Description=http://www.vishay.com/docs/20043/crcwhpe3.pdf, ComponentLink1URL=http://www.vishay.com/docs/20043/crcwhpe3.pdf, Composition="Thick Film", Failure Rate=-, Features="Automotive AEC-Q200, Pulse Withstanding", Height - Seated (Max)="0.020\" (0.50mm)", Packaging="Cut Tape (CT)", Part Status=Active, Pricing 1="1=0.28, 10=0.233, 100=0.0911, 1000=0.03812, 2500=0.03494 (USD)", RoHS="RoHS Compliant", Size / Dimension="0.079\" L x 0.049\" W (2.00mm x 1.25mm)", Stock 1=3851, Supplier 1=Digi-Key
R2: library part CMP-1013-00215-1, "RES SMD 499K OHM 0.1% 1/8W 0805", Manufacturer="Panasonic Electronic Components", Manufacturer Part Number=ERA-6AEB4993V, Operating Temperature="-55°C ~ 155°C", Package / Case="0805 (2012 Metric)", Power (Watts)="0.125W, 1/8W", Supplier Device Package=0805, Supplier Part Number 1=P499KDACT-ND, Temperature Coefficient=±25ppm/°C, Tolerance=±0.1%, Category=Resistors, ComponentLink1Description=https://industrial.panasonic.com/cdbs/www-data/pdf/RDM0000/AOA0000C307.pdf, ComponentLink1URL=https://industrial.panasonic.com/cdbs/www-data/pdf/RDM0000/AOA0000C307.pdf, Composition="Thin Film", Failure Rate=-, Features="Automotive AEC-Q200", Height - Seated (Max)="0.024\" (0.60mm)", Packaging="Cut Tape (CT)", Part Status=Active, Pricing 1="1=0.36, 10=0.302, 100=0.1182, 1000=0.04948, 2500=0.04536 (USD)", RoHS="RoHS Compliant", Size / Dimension="0.079\" L x 0.049\" W (2.00mm x 1.25mm)", Stock 1=125602, Supplier 1=Digi-Key
R3: library part CMP-1013-00215-1, "RES SMD 18.2K OHM 1% 1/8W 0805", Manufacturer="Panasonic Electronic Components", Manufacturer Part Number=ERJ-6ENF1822V, Operating Temperature="-55°C ~ 155°C", Package / Case="0805 (2012 Metric)", Power (Watts)="0.125W, 1/8W", Supplier Device Package=0805, Supplier Part Number 1=P18.2KCCT-ND, Temperature Coefficient=±100ppm/°C, Tolerance=±1%, Category=Resistors, ComponentLink1Description=https://industrial.panasonic.com/cdbs/www-data/pdf/RDA0000/AOA0000C304.pdf, ComponentLink1URL=https://industrial.panasonic.com/cdbs/www-data/pdf/RDA0000/AOA0000C304.pdf, Composition="Thick Film", Failure Rate=-, Features="Automotive AEC-Q200", Height - Seated (Max)="0.028\" (0.70mm)", Packaging="Cut Tape (CT)", Part Status=Active, Pricing 1="1=0.1, 10=0.079, 100=0.0305, 1000=0.0134, 2500=0.01157 (USD)", RoHS="RoHS Compliant", Size / Dimension="0.079\" L x 0.049\" W (2.00mm x 1.25mm)", Stock 1=116820, Supplier 1=Digi-Key
R4: library part CMP-1013-00215-1, "RES SMD 249K OHM 0.1% 1/8W 0805", Manufacturer="Panasonic Electronic Components", Manufacturer Part Number=ERA-6AEB2493V, Operating Temperature="-55°C ~ 155°C", Package / Case="0805 (2012 Metric)", Power (Watts)="0.125W, 1/8W", Supplier Device Package=0805, Supplier Part Number 1=P249KDACT-ND, Temperature Coefficient=±25ppm/°C, Tolerance=±0.1%, Category=Resistors, ComponentLink1Description=https://industrial.panasonic.com/cdbs/www-data/pdf/RDM0000/AOA0000C307.pdf, ComponentLink1URL=https://industrial.panasonic.com/cdbs/www-data/pdf/RDM0000/AOA0000C307.pdf, Composition="Thin Film", Failure Rate=-, Features="Automotive AEC-Q200", Height - Seated (Max)="0.024\" (0.60mm)", Packaging="Cut Tape (CT)", Part Status=Active, Pricing 1="1=0.36, 10=0.302, 100=0.1182, 1000=0.04948, 2500=0.04536 (USD)", RoHS="RoHS Compliant", Size / Dimension="0.079\" L x 0.049\" W (2.00mm x 1.25mm)", Stock 1=18568, Supplier 1=Digi-Key
R5 R11 R12 R15 R17 R26: library part CMP-1013-00215-1, "RES SMD 0 OHM JUMPER 1/8W 0805", Manufacturer="Panasonic Electronic Components", Manufacturer Part Number=ERJ-6GEY0R00V, Operating Temperature="-55°C ~ 155°C", Package / Case="0805 (2012 Metric)", Power (Watts)="0.125W, 1/8W", Supplier Device Package=0805, Supplier Part Number 1=P0.0ACT-ND, Temperature Coefficient=-, Tolerance=Jumper, Category=Resistors, ComponentLink1Description=http://industrial.panasonic.com/www-cgi/jvcr13pz.cgi?E+PZ+3+AOA0001+ERJ6GEY0R00V+7+WW, ComponentLink1URL=http://industrial.panasonic.com/www-cgi/jvcr13pz.cgi?E+PZ+3+AOA0001+ERJ6GEY0R00V+7+WW, Composition="Thick Film", Failure Rate=-, Features="Automotive AEC-Q200", Height - Seated (Max)="0.028\" (0.70mm)", Packaging="Cut Tape (CT)", Part Status=Active, Pricing 1="1=0.1, 10=0.074, 25=0.0532, 50=0.0406, 100=0.03, 250=0.02288, 500=0.0183, 1000=0.01347 (USD)", RoHS="RoHS Compliant", Size / Dimension="0.079\" L x 0.049\" W (2.00mm x 1.25mm)", Stock 1=3414819, Supplier 1=Digi-Key
R6: library part CMP-1013-00215-1, "RES SMD 33K OHM 1% 1/2W 0805", Manufacturer="Vishay Dale", Manufacturer Part Number=CRCW080533K0FKEAHP, Operating Temperature="-55°C ~ 155°C", Package / Case="0805 (2012 Metric)", Power (Watts)="0.5W, 1/2W", Supplier Device Package=0805, Supplier Part Number 1=541-33.0KTCT-ND, Temperature Coefficient=±100ppm/°C, Tolerance=±1%, Category=Resistors, ComponentLink1Description=http://www.vishay.com/docs/20043/crcwhpe3.pdf, ComponentLink1URL=http://www.vishay.com/docs/20043/crcwhpe3.pdf, Composition="Thick Film", Failure Rate=-, Features="Automotive AEC-Q200, Pulse Withstanding", Height - Seated (Max)="0.020\" (0.50mm)", Packaging="Cut Tape (CT)", Part Status=Active, Pricing 1="1=0.28, 10=0.233, 100=0.0911, 1000=0.03812, 2500=0.03494 (USD)", RoHS="RoHS Compliant", Size / Dimension="0.079\" L x 0.049\" W (2.00mm x 1.25mm)", Stock 1=2026, Supplier 1=Digi-Key
R7: library part CMP-1013-00393-1
R8: library part CMP-1013-00215-1, "RES SMD 43.2K OHM 1% 1/8W 0805", Manufacturer="Vishay Dale", Manufacturer Part Number=CRCW080543K2FKEA, Operating Temperature="-55°C ~ 155°C", Package / Case="0805 (2012 Metric)", Power (Watts)="0.125W, 1/8W", Supplier Device Package=0805, Supplier Part Number 1=541-43.2KCCT-ND, Temperature Coefficient=±100ppm/°C, Tolerance=±1%, Category=Resistors, ComponentLink1Description=http://www.vishay.com/docs/20035/dcrcwe3.pdf, ComponentLink1URL=http://www.vishay.com/docs/20035/dcrcwe3.pdf, Composition="Thick Film", Failure Rate=-, Features="Automotive AEC-Q200", Height - Seated (Max)="0.020\" (0.50mm)", Packaging="Cut Tape (CT)", Part Status=Active, Pricing 1="1=0.1, 10=0.055, 100=0.0223, 1000=0.01003, 2500=0.0087 (USD)", RoHS="RoHS Compliant", Size / Dimension="0.079\" L x 0.049\" W (2.00mm x 1.25mm)", Stock 1=68577, Supplier 1=Digi-Key
R9 R16: library part CMP-1013-00215-1, "RES SMD 4.02K OHM 1% 1/8W 0805", Manufacturer="Vishay Dale", Manufacturer Part Number=CRCW08054K02FKEAHP, Operating Temperature="-55°C ~ 155°C", Package / Case="0805 (2012 Metric)", Power (Watts)="0.5W, 1/2W", Supplier Device Package=0805, Supplier Part Number 1=541-4.02KTCT-ND, Temperature Coefficient=±100ppm/°C, Tolerance=±1%, Category=Resistors, ComponentLink1Description=http://www.vishay.com/docs/20043/crcwhpe3.pdf, ComponentLink1URL=http://www.vishay.com/docs/20043/crcwhpe3.pdf, Composition="Thick Film", Failure Rate=-, Features="Automotive AEC-Q200, Pulse Withstanding", Height - Seated (Max)="0.020\" (0.50mm)", Packaging="Cut Tape (CT)", Part Status=Active, Pricing 1="1=0.28, 10=0.233, 100=0.0911, 1000=0.03812, 2500=0.03494 (USD)", RoHS="RoHS Compliant", Size / Dimension="0.079\" L x 0.049\" W (2.00mm x 1.25mm)", Stock 1=2935, Supplier 1=Digi-Key
R10 R14: library part CMP-1013-00215-1, "RES SMD 7.5K OHM 1% 1/8W 0805", Manufacturer="Vishay Dale", Manufacturer Part Number=CRCW08057K50FKEA, Operating Temperature="-55°C ~ 155°C", Package / Case="0805 (2012 Metric)", Power (Watts)="0.125W, 1/8W", Supplier Device Package=0805, Supplier Part Number 1=541-7.50KCCT-ND, Temperature Coefficient=±100ppm/°C, Tolerance=±1%, Category=Resistors, ComponentLink1Description=http://www.vishay.com/docs/20035/dcrcwe3.pdf, ComponentLink1URL=http://www.vishay.com/docs/20035/dcrcwe3.pdf, Composition="Thick Film", Failure Rate=-, Features="Automotive AEC-Q200", Height - Seated (Max)="0.020\" (0.50mm)", Packaging="Cut Tape (CT)", Part Status=Active, Pricing 1="1=0.1, 10=0.055, 100=0.0223, 1000=0.01003, 2500=0.0087 (USD)", RoHS="RoHS Compliant", Size / Dimension="0.079\" L x 0.049\" W (2.00mm x 1.25mm)", Stock 1=2093, Supplier 1=Digi-Key
R13: library part Trimmer, Manufacturer="Vishay Foil Resistors (Division of Vishay Precision Group)", Manufacturer Part Number=Y00535K00000J0L, Power (Watts)="0.25W, 1/4W", Resistance (Ohms)=5k, Resistive Material="Metal Foil", Supplier Part Number 1=804-1020-ND, Temperature Coefficient=±10ppm/°C, Tolerance=±5%, Adjustment Type="Side Adjustment", Category="Potentiometers, Variable Resistors", ComponentLink1Description=http://www.vishaypg.com/docs/63053/1240.pdf, ComponentLink1URL=http://www.vishaypg.com/docs/63053/1240.pdf, Mounting Type="Through Hole", Number of Turns=21, Packaging=Bulk, Part Status=Active, Pricing 1="1=34.42, 10=32.265, 25=26.5292, 50=22.944, 100=22.227, 250=20.793, 500=19.2156 (USD)", RoHS="RoHS Compliant", Size / Dimension="Rectangular - 0.250\" x 0.175\" Face x 0.250\" L (6.35mm x 4.45mm x 6.35mm)", Stock 1=679, Supplier 1=Digi-Key, Termination Style="PC Pins"
R18 R19: library part CMP-1013-00215-1, "RES SMD 1M OHM 1% 1/8W 0805", Manufacturer="Vishay Dale", Manufacturer Part Number=RCV08051M00FKEA, Operating Temperature="-55°C ~ 155°C", Package / Case="0805 (2012 Metric)", Power (Watts)="0.125W, 1/8W", Supplier Device Package=0805, Supplier Part Number 1=BC2810CT-ND, Temperature Coefficient=±100ppm/°C, Tolerance=±1%, Category=Resistors, ComponentLink1Description=http://www.vishay.com/docs/20054/rcve3.pdf, ComponentLink1URL=http://www.vishay.com/docs/20054/rcve3.pdf, Composition="Thick Film", Failure Rate=-, Features="High Voltage", Height - Seated (Max)="0.020\" (0.50mm)", Packaging="Cut Tape (CT)", Part Status=Active, Pricing 1="1=0.31, 10=0.266, 100=0.1041, 1000=0.04356, 2500=0.03993 (USD)", RoHS="RoHS Compliant", Size / Dimension="0.079\" L x 0.049\" W (2.00mm x 1.25mm)", Stock 1=15942, Supplier 1=Digi-Key
R20 R22: library part CMP-1013-00215-1, "RES SMD 100K OHM 1% 1/8W 0805", Manufacturer="Vishay Dale", Manufacturer Part Number=RCA0805100KFKEA, Operating Temperature="-55°C ~ 155°C", Package / Case="0805 (2012 Metric)", Power (Watts)="0.125W, 1/8W", Supplier Device Package=0805, Supplier Part Number 1=541-2230-1-ND, Temperature Coefficient=±100ppm/°C, Tolerance=±1%, Category=Resistors, ComponentLink1Description=http://www.vishay.com/docs/20037/rcae3.pdf, ComponentLink1URL=http://www.vishay.com/docs/20037/rcae3.pdf, Composition="Thick Film", Failure Rate=-, Features="Anti-Sulfur, Automotive AEC-Q200", Height - Seated (Max)="0.020\" (0.50mm)", Packaging="Cut Tape (CT)", Part Status=Active, Pricing 1="1=0.1, 10=0.079, 100=0.0303, 1000=0.01331, 2500=0.0115 (USD)", RoHS="RoHS Compliant", Size / Dimension="0.079\" L x 0.049\" W (2.01mm x 1.25mm)", Stock 1=18704, Supplier 1=Digi-Key
R21 R24 R25: library part CMP-1013-00215-1, "RES SMD 10K OHM 1% 1/8W 0805", Manufacturer="Vishay Dale", Manufacturer Part Number=CRCW080510K0FKEA, Operating Temperature="-55°C ~ 155°C", Package / Case="0805 (2012 Metric)", Power (Watts)="0.125W, 1/8W", Supplier Device Package=0805, Supplier Part Number 1=541-10.0KCCT-ND, Temperature Coefficient=±100ppm/°C, Tolerance=±1%, Category=Resistors, ComponentLink1Description=http://www.vishay.com/docs/20035/dcrcwe3.pdf, ComponentLink1URL=http://www.vishay.com/docs/20035/dcrcwe3.pdf, Composition="Thick Film", Failure Rate=-, Features="Automotive AEC-Q200", Height - Seated (Max)="0.020\" (0.50mm)", Packaging="Cut Tape (CT)", Part Status=Active, Pricing 1="1=0.1, 10=0.055, 100=0.0223, 1000=0.01003, 2500=0.0087 (USD)", RoHS="RoHS Compliant", Size / Dimension="0.079\" L x 0.049\" W (2.00mm x 1.25mm)", Stock 1=1104982, Supplier 1=Digi-Key
R23: library part CMP-1013-00215-1, "RES SMD 10K OHM 1% 1/8W 0805"
TP2 TP3 TP4 TP5 TP6 TP7 TP8 TP9 TP10 TP11: library part CMP-1672-00009-1, "Test Point, Orange, 1-Pin THD, RoHS", Forward Current="3 A", Forward Voltage="1.08 V", Max Operating Temperature="150 degC", Max Surge Current="80 A", Min Operating Temperature="-65 degC", Package Quantity=500, Peak Reverse Current="600 uA", ComponentLink1Description="Manufacturer URL", ComponentLink1URL=http://www.keyelco.com/, ComponentLink2Description=Datasheet, ComponentLink2URL=http://keyelco.com/userAssets/file/M65p56.pdf, DatasheetVersion=Jun-15, Diameter="5.3 mm", Height="0.25 inch", Length="9.5 mm", Mount="Through Hole", PackageDescription="1-Pin Through Hole Device, Dia 2.54 mm", PackageReference=5003, Packaging=Bulk, Pins=2, Radiation Hardening=No, REACH SVHC="No SVHC", RoHSCompliant=true, Weight="0.01 lb", Width="0.25 inch"
U1 U4: library part MAX333CWP+, "IC SWITCH QUAD SPDT 20TSSOP", Base Part Number=MAX333, Channel Capacitance (CS(off), CD(off))=5pF, Current - Leakage (IS(off)) (Max)=250pA, Manufacturer="Maxim Integrated", On-State Resistance (Max)="45 Ohm", Operating Temperature="-40°C ~ 85°C (TA)", Package / Case="20-TSSOP (0.173\", 4.40mm Width)", Supplier Device Package=20-TSSOP, Supplier Part Number 1=MAX333AEUP+-ND, Voltage - Supply, Dual (V±)="±4.5 V ~ 20 V", Voltage - Supply, Single (V+)="10 V ~ 30 V", -3db Bandwidth=-, Category="Integrated Circuits (ICs)", Channel-to-Channel Matching (&Delta;Ron)="2 Ohm (Max)", Charge Injection=2pC, ComponentLink1Description=https://pdfserv.maximintegrated.com/en/ds/MAX333A.pdf, ComponentLink1URL=https://pdfserv.maximintegrated.com/en/ds/MAX333A.pdf, Crosstalk="-78dB @ 1MHz", Manufacturer Part Number=MAX333AEUP+, Multiplexer/Demultiplexer Circuit=2:1, Packaging=Tube, Part Status=Active, Pricing 1="1=6.77, 10=6.432, 25=6, 50=5.8942 (USD)", RoHS="RoHS Compliant", Stock 1=1328, Supplier 1=Digi-Key, Switch Circuit=SPDT, Switch Time (Ton, Toff) (Max)="175ns, 145ns"
U2: library part CMP-0055-00867-3, "Low Power CMOS Dual Operational Amplifier, 8-pin Narrow SOIC", Base Part Number=LPC662, Current - Supply=86µA, Manufacturer="Texas Instruments", Manufacturer Part Number=LPC662AIM/NOPB, Operating Temperature="-40°C ~ 85°C", Package / Case="8-SOIC (0.154\", 3.90mm Width)", Supplier Device Package=8-SOIC, Supplier Part Number 1=LPC662AIM/NOPB-ND, Voltage - Supply, Single/Dual (±)="4.75 V ~ 15.5 V, ±2.38 V ~ 7.75 V", Amplifier Type="General Purpose", Category="Integrated Circuits (ICs)", ComponentLink1Description=http://www.ti.com/lit/ds/symlink/lpc662.pdf, ComponentLink1URL=http://www.ti.com/lit/ds/symlink/lpc662.pdf, Mounting Type="Surface Mount", Output Type=Rail-to-Rail, Packaging=Tube, Part Status=Active, Pricing 1="1=3.4, 95=2.88905, 190=2.50379, 570=2.13144, 1045=1.7976 (USD)", RoHS="RoHS Compliant", Slew Rate="0.11 V/µs", Stock 1=319, Supplier 1=Digi-Key
U3: library part CMP-0784-00054-1, "Pin Programmable, Precision Voltage Reference, + 2.5 / + 5 / + 7.5 / + 10 Prog V Output, 4.5 to 30 V Supply, Commercial, 8-pin DIP (N-8), Tube", Base Part Number=AD584, Current - Supply=1mA, Manufacturer="Analog Devices Inc.", Operating Temperature="0°C ~ 70°C (TA)", Package / Case="8-DIP (0.300\", 7.62mm)", Supplier Device Package=8-PDIP, Supplier Part Number 1=AD584KNZ-ND, Temperature Coefficient=15ppm/°C, Tolerance=±0.1%, Voltage - Input="4.5 V ~ 30 V", Voltage - Output (Min/Fixed)="2.5V, 5V, 7.5V, 10V", Category="Integrated Circuits (ICs)", ComponentLink1Description=http://www.analog.com/media/en/technical-documentation/data-sheets/AD584.pdf, ComponentLink1URL=http://www.analog.com/media/en/technical-documentation/data-sheets/AD584.pdf, Manufacturer Part Number=AD584KNZ, Mounting Type="Through Hole", Noise - 0.1Hz to 10Hz=50µVp-p, Noise - 10Hz to 10kHz=-, Output Type=Programmable, Packaging=Tube, Part Status=Active, Pricing 1="1=17.64, 50=15.54, 100=13.692 (USD)", Reference Type=Series, RoHS="RoHS Compliant", Stock 1=387, Supplier 1=Digi-Key
U5: "IC DELAY BLOCK 8TAP PROG TSOT23", Base Part Number=LTC6994, Manufacturer="Linear Technology/Analog Devices", Manufacturer Part Number=LTC6994CS6-2#TRMPBF, Operating Temperature="0°C ~ 70°C", Package / Case="SOT-23-6 Thin, TSOT-23-6", Supplier Device Package=TSOT-23-6, Supplier Part Number 1=LTC6994CS6-2#TRMPBFCT-ND, Voltage - Supply="2.25 V ~ 5.5 V", Available Total Delays="1µs ~ 33.6s", Category="Integrated Circuits (ICs)", ComponentLink1Description=http://www.linear.com/docs/29725, ComponentLink1URL=http://www.linear.com/docs/29725, Delay to 1st Tap=-, Function=Programmable, Mounting Type="Surface Mount", Packaging="Cut Tape (CT)", Part Status=Active, Pricing 1="1=3.42, 25=3.0496, 100=1.9217, 250=1.76156 (USD)", RoHS="RoHS Compliant", Stock 1=1401, Supplier 1=Digi-Key
U6: library part CMP-0784-00054-1, "Pin Programmable, Precision Voltage Reference, + 2.5 / + 5 / + 7.5 / + 10 Prog V Output, 4.5 to 30 V Supply, Commercial, 8-pin DIP (N-8), Tube", Manufacturer="Analog Devices", Operating Temp Range="0 to 70 degC", Code_JEDEC=MS-001, ComponentLink1Description="Manufacturer URL", ComponentLink1URL=http://www.analog.com/en/index.html, ComponentLink2Description=Datasheet, ComponentLink2URL=http://www.analog.com/static/imported-files/data_sheets/AD584.pdf, ComponentLink3Description="Package Specification", ComponentLink3URL=http:/www.analog.com/static/imported-files/packages/PKG_PDF/PDIP(N)/N_8.pdf, ComponentLink4Description="URL Link1", ComponentLink4URL="Product URL:http://www.analog.com/en/special-linear-functions/voltage-references/ad584/products/product.html", DatasheetVersion="Rev. C", Max V Supply (V)=30, Min V Supply (V)=4.5, Mounting Technology="Through Hole", PackageDescription="8-Pin Plastic Dual In-Line Package, Row spacing 7.62 mm, Pitch 2.54 mm", PackageReference=N-8, PackageVersion="070606-A, 07/2006", Packing=Tube, PartNumber=AD584KNZ, Ref Out TC (ppm/C)=15, Vout="2.5V, 5V, 7.5V, 10V"
U7 U9: library part CMP-0809-00005-2, "Precision, Low Noise, Rail-to-Rail Output, Zero-Drift Operational Amplifier, 4 to 36 V, -40 to 125 degC, 5-pin SOT23 (DBV5), Green (RoHS & no Sb/Br)", Manufacturer="Texas Instruments", Rating=Catalog, Total Supply Voltage(Max)(+5V is 5, +/-5V is 10)=36, Total Supply Voltage(Min)(+5V is 5, +/-5V is 10)=4, CMRR(Min)(dB)=120, Code_JEDEC=MO-178, ComponentLink1Description="Manufacturer URL", ComponentLink1URL=http://www.ti.com/, ComponentLink2Description=Datasheet, ComponentLink2URL=http://www.ti.com/lit/ds/symlink/opa188.pdf, ComponentLink3Description="Package Specification", ComponentLink3URL=http://www.ti.com/litv/pdf/mpds018i, DatasheetVersion=SBOS642A, Eco-Plan="Green (RoHS & no Sb/Br)", GBW(Typ)(MHz)=2, Iq per channel(Max)(mA)=0.51, Mounting Technology="Surface Mount", Number of Channels=1, Offset Drift(Typ)(uV/C)=0.03, PackageDescription="5-Pin Plastic Small Outline, Body 1.6 x 2.9 mm, Pitch 0.95 mm", PackageReference=DBV0005A, PackageVersion="4073253-4/K, 03/2006", PartNumber=OPA188AIDBVR, Slew Rate(Typ)(V/us)=0.8, SubFamily="Zero Drift Precision Amplifier"
U11: library part CMP-0793-00109-1, "Low Capacitance, Low Charge Injection, +/-15 V / +12 V, 4:1 iCMOS Multiplexer, 120 Ohm Ron, 14-pin SOP (RU-14), Reel", Base Part Number=MAX11100, Manufacturer="Maxim Integrated", Manufacturer Part Number=MAX11100EUB+, Operating Temperature="-40°C ~ 85°C", Package / Case="10-TFSOP, 10-MSOP (0.118\", 3.00mm Width)", Supplier Device Package=10-uMAX, Supplier Part Number 1=MAX11100EUB+-ND, Voltage - Supply, Analog=5V, Voltage - Supply, Digital="2.7 V ~ 5.25 V", Architecture=SAR, Category="Integrated Circuits (ICs)", ComponentLink1Description=https://datasheets.maximintegrated.com/en/ds/MAX11100.pdf, ComponentLink1URL=https://datasheets.maximintegrated.com/en/ds/MAX11100.pdf, Configuration=S/H-ADC, Data Interface=SPI, Features=-, Input Type="Single Ended", Number of Bits=16, Number of Inputs=1, Packaging=Tube, Part Status=Active, Pricing 1="1=5.98, 10=5.855 (USD)", Ratio - S/H:ADC=1:1, Reference Type=External, RoHS="RoHS Compliant", Sampling Rate (Per Second)=200k, Stock 1=927, Supplier 1=Digi-Key
U12: library part CMP-0249-00017-1, "16-Bit, +5V, 200ksps ADC with 10uA Shutdown, 10-Pin uMAX, -40°C to +85°C, Pb-Free, Tape and Reel", Base Part Number=MAX11100, Manufacturer="Maxim Integrated", Manufacturer Part Number=MAX11100EUB+, Operating Temperature="-40°C ~ 85°C", Package / Case="10-TFSOP, 10-MSOP (0.118\", 3.00mm Width)", Supplier Device Package=10-uMAX, Supplier Part Number 1=MAX11100EUB+-ND, Voltage - Supply, Analog=5V, Voltage - Supply, Digital="2.7 V ~ 5.25 V", Architecture=SAR, Category="Integrated Circuits (ICs)", ComponentLink1Description=https://datasheets.maximintegrated.com/en/ds/MAX11100.pdf, ComponentLink1URL=https://datasheets.maximintegrated.com/en/ds/MAX11100.pdf, Configuration=S/H-ADC, Data Interface=SPI, Features=-, Input Type="Single Ended", Number of Bits=16, Number of Inputs=1, Packaging=Tube, Part Status=Active, Pricing 1="1=5.98, 10=5.855 (USD)", Ratio - S/H:ADC=1:1, Reference Type=External, RoHS="RoHS Compliant", Sampling Rate (Per Second)=200k, Stock 1=927, Supplier 1=Digi-Key
U14: "IC VREF SERIES 4.096V SOT23", Current - Supply=350µA, Manufacturer="Maxim Integrated", Operating Temperature="-40°C ~ 125°C (TA)", Package / Case=SOT-23-6, Supplier Part Number 1=MAX6070AAUT41+TCT-ND, Temperature Coefficient=6ppm/°C, Tolerance=±0.04%, Voltage - Input="4.3 V ~ 5.5 V", Voltage - Output (Min/Fixed)=4.096V, Category="Integrated Circuits (ICs)", ComponentLink1Description=https://datasheets.maximintegrated.com/en/ds/MAX6070-MAX6071.pdf, ComponentLink1URL=https://datasheets.maximintegrated.com/en/ds/MAX6070-MAX6071.pdf, Manufacturer Part Number=MAX6070AAUT41+T, Mounting Type="Surface Mount", Noise - 0.1Hz to 10Hz=9.6µVp-p, Noise - 10Hz to 10kHz=9µVrms, Output Type=Fixed, Packaging="Cut Tape (CT)", Part Status=Active, Pricing 1="1=3.41, 10=3.213, 25=2.5704, 50=2.4418, 100=2.2491, 250=2.13344, 500=2.05634 (USD)", Reference Type=Series, RoHS="RoHS Compliant", Stock 1=2623, Supplier 1=Digi-Key, Supplier Device Package=SOT-23-6

## Free pads (board coordinates)
  round 5 hole 3: ""(-33.719,-71.438) ""(-33.719,-11.438) ""(20.281,-71.438) ""(20.281,-11.438)

## Via types
v1: diameter 1/1/1/1 (per signal layer), hole 0.5, Top Layer to Bottom Layer, 38 vias
v2: diameter 1, hole 0.5, Top Layer to Bottom Layer, 28 vias
v3: diameter 1.27, hole 0.711, Top Layer to Bottom Layer, 10 vias

## Nets (pads, with @x,y where several pads share a name; then routed paths per layer and width w, separated by ;. In a path a pad name is that pad's centre, name@x,y a point inside that pad or via, vN(x,y) a via of type N, cw(c..) or ccw(c..) an arc to the next point about the centre after c; other vN are vias at no path point)
+3.3: C10.1 C23.1 P3.6 P4.25 U5.5 U12.3 | length 11.2
  Top Layer w0.254: v2(-0.254,-56.642) -0.111,-56.499 0.236,-56.499 1.501,-55.234 C23.1 1.944,-54.941 1.944,-53.274 2.608,-52.61 3.348,-52.61 U12.3 4.118,-52.608
  Bottom Layer w0.254: v2(-26.836,-61.913) -26.836,-60.117 C10.1 ; C10.1@-26.816,-60.053 U5.5
+5: C3.1 C20.2 C22.1 P2.4 P3.2 P4.22 R2.2 U2.8 U9.5 U11.2 U11.12 U12.7 U14.3 U14.4 | length 26.5
  Top Layer w0.254: v3(-19.558,-49.657) -19.558,-48.172 R2.2 ; v2(-14.184,-40.064) -12.695,-40.064 U2.8 -12.65,-38.588 C3.1@-12.66,-38.578 ; U14.3 -3.939,-53.831 -2.214,-52.106 0.17,-52.106 0.683,-51.593 v2(0.885,-51.593) ; v3(1.27,-2.719) P2.4 ; U11.2 9.565,-48.756 10.085,-49.276 v2(10.287,-49.276) ; C20.2 12.468,-61.228 U9.5 12.517,-58.865 v2(13.55,-58.865) ; U11.12 13.065,-49.424 14.486,-49.424 v2(14.521,-49.459)
  Bottom Layer w0.254: v2(0.885,-51.593) 0.885,-50.548 C22.1@1.192,-50.24
"+5 BBB": P4.1
+5R: R24.2 U4.12 U4.17 U7.1 U7.4 | length 86.5
  Top Layer w0.254: U4.17 -25.996,2.358 -26.448,1.906 -26.448,-0.44 -25.996,-0.892 -24.946,-0.892 -23.565,-2.272 -23.565,-10.739 -23.367,-10.937 U7.1 -22.943,-11.135 -22.168,-11.135 -20.466,-12.837 U7.4 -20.171,-12.858 -18.384,-12.858 v3(-18.364,-12.878) ; v2(1.612,-65.088) R24.2
  Bottom Layer w0.254: v3(-18.364,-12.878) -15.937,-15.305 -15.297,-15.305 -6.538,-24.064 -6.538,-56.938 v2(1.612,-65.088)
+12: C2.1 C11.1 C15.2 C18.1 P3.14 P4.29 P4.30 U1.16 U4.16 U6.8 U7.5 | length 123.8
  Top Layer w0.254: U4.16 -25.468,1.711 -23.791,1.711 v2(-23.788,1.714) ; U1.16@-21.737,-40.244 v3(-19.408,-40.244) -19.408,-37.961 C2.1 ; v2(-18.454,-9.335) -19.61,-9.335 C15.2 -20.147,-9.694 -20.147,-10.893 U7.5 -19.015,-10.937 -15.723,-14.23 U6.8 -13.549,-16.332 C18.1
  Signal Layer 1 w0.254: v2@-23.794,1.708 -23.788,1.702 -23.788,-4.001 v2(-18.454,-9.335) ; v3(-19.408,-40.244) -11.056,-48.597 -5.861,-48.597 2.54,-56.998 P4.29
  Bottom Layer w0.254: P3.14 -22.974,-36.678 -20.32,-39.332 ; C11.1 -23.788,0.378 v2(-23.788,1.714) ; -20.32,-27.889 -20.32,-28.88 ; v3(-19.408,-40.244) -20.32,-39.332 ; U6.8 -20.32,-20.93 -20.32,-28.88 ; P4.29 P4.30 ; -20.32,-39.332 -20.32,-28.88
-5: C4.1 C5.1 C12.1 P2.3 P3.18 P4.26 U1.5 U2.4 U4.5 | length 164.7
  Top Layer w0.254: C12.1@-34.112,1.562 -33.966,1.708 -32.201,1.708 ; P3.18 -31.471,-41.758 -28.103,-38.39 v2(-28.103,-32.901) ; U4.5 -32.201,1.708 ; v2(-30.861,-4.572) -32.35,-3.084 -32.35,1.559 -32.201,1.708 ; -29.972,-40.244 -29.911,-40.183 v3(-25.044,-40.183) ; C5.1@-7.58,-46.884 -7.58,-46.878 -8.051,-46.407 -8.602,-46.407 -8.84,-46.168 -8.84,-42.34 v3(-7.45,-40.95) ; v2(-0.952,5.461) -0.952,2.857 P2.3
  Signal Layer 2 w0.254: v2(-28.103,-32.901) -15.499,-32.901 v3(-7.45,-40.95) 8.775,-40.95 18.242,-50.417 20.05,-50.417 P4.26
  Bottom Layer w0.254: v2(-28.103,-32.901) -30.861,-30.143 v2(-30.861,-4.572) -28.611,-6.822 -13.236,-6.822 v2(-0.952,5.461) ; v3(-25.044,-40.183) -25.044,-41.885 -24.903,-42.026 C4.1@-24.257,-42.026
"ADC REF": C26.1 U12.6 U14.5 U14.6 | length 6.6
  Top Layer w0.254: U14.5 -5.653,-52.104 -5.48,-51.931 -5.453,-51.931 -4.69,-51.168 -2.602,-51.168 -2.225,-50.791 -1.41,-51.606 -0.702,-51.606 U12.6
AGND: C2.2 C3.2 C4.2 C5.2 C6.1 C8.2 C9.2 C11.2 C12.2 C15.1 C17.2 C18.2 C19.1 C20.1 C21.1 C22.2 C24.1 C25.1 P1.1 P2.2 P2.9 P5.2 P6.2 R6.1 R7.2 R13.2 R18.1 R19.1 R23.1 R25.1 R26.2 U1.12 U3.4 U4.2 U4.6 U4.14 U4.19 U6.4 U7.2 U9.2 U11.3 U11.13 U12.4 U12.8 U14.2 | length 9.9
  Top Layer w0.254: C21.1 -13.424,-59.744 -11.514,-57.834 v3(-11.514,-57.686) ; U12.8 1.632,-52.608 2.132,-52.108 U12.4
  Bottom Layer w0.254: P5.2@-11.514,-60.325 v3(-11.514,-57.686)